# EAGLE board Pedalbox (EAGLE 7.7.0)
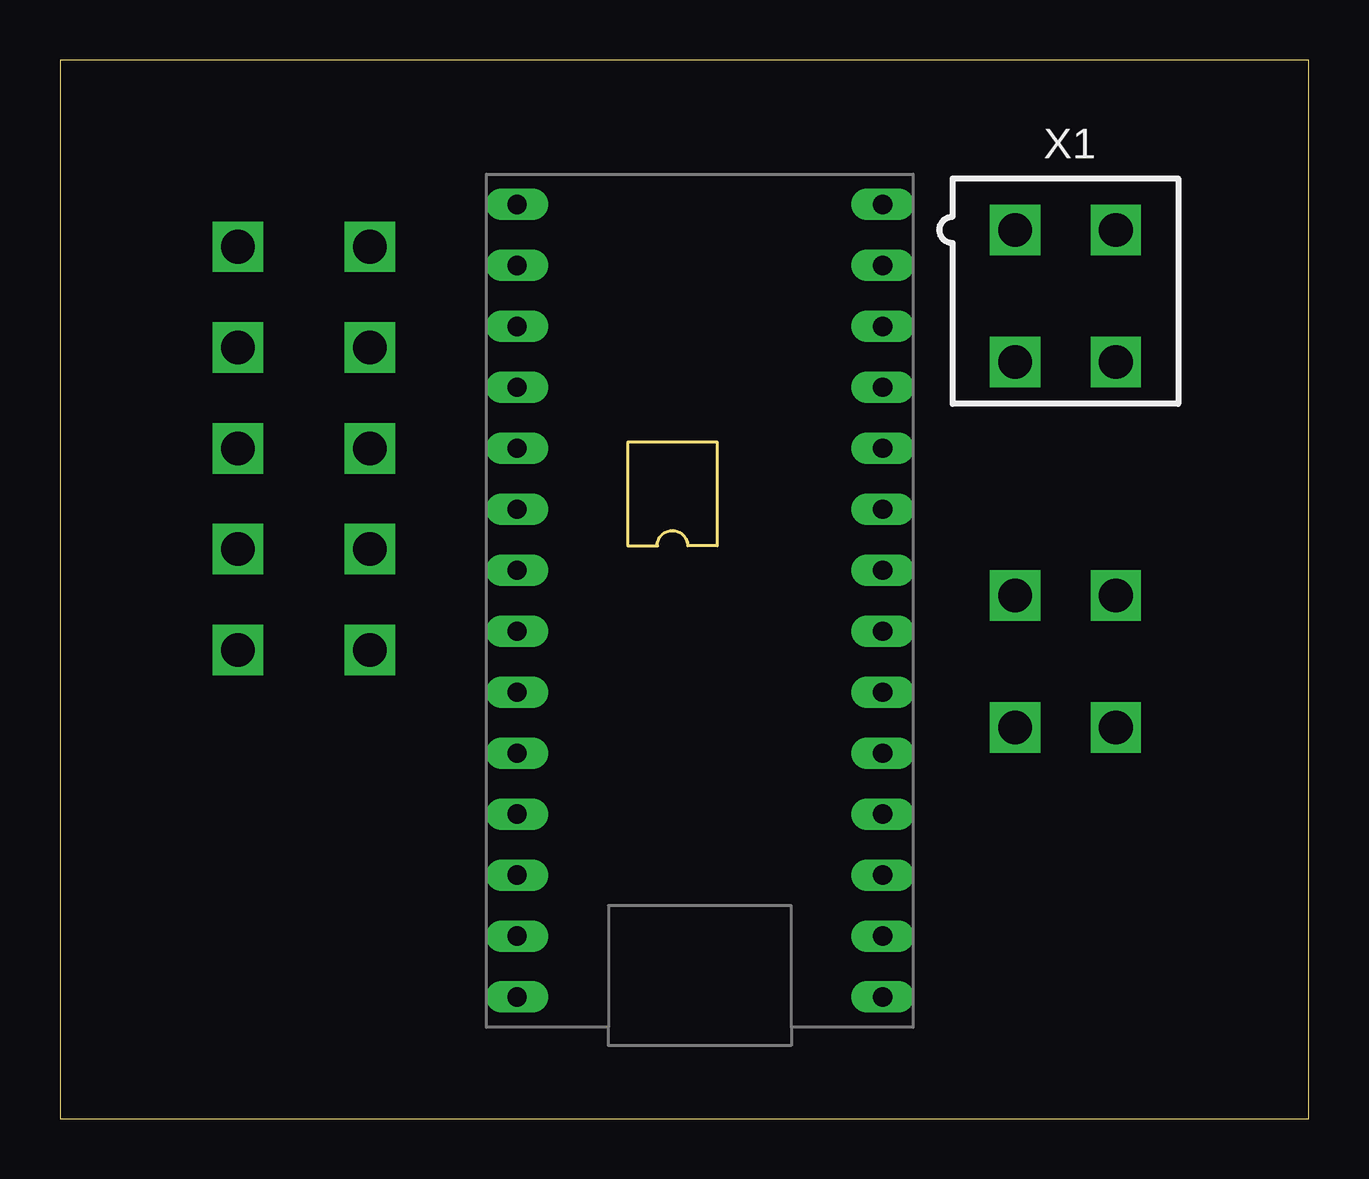
[diagram p0: board, top side]
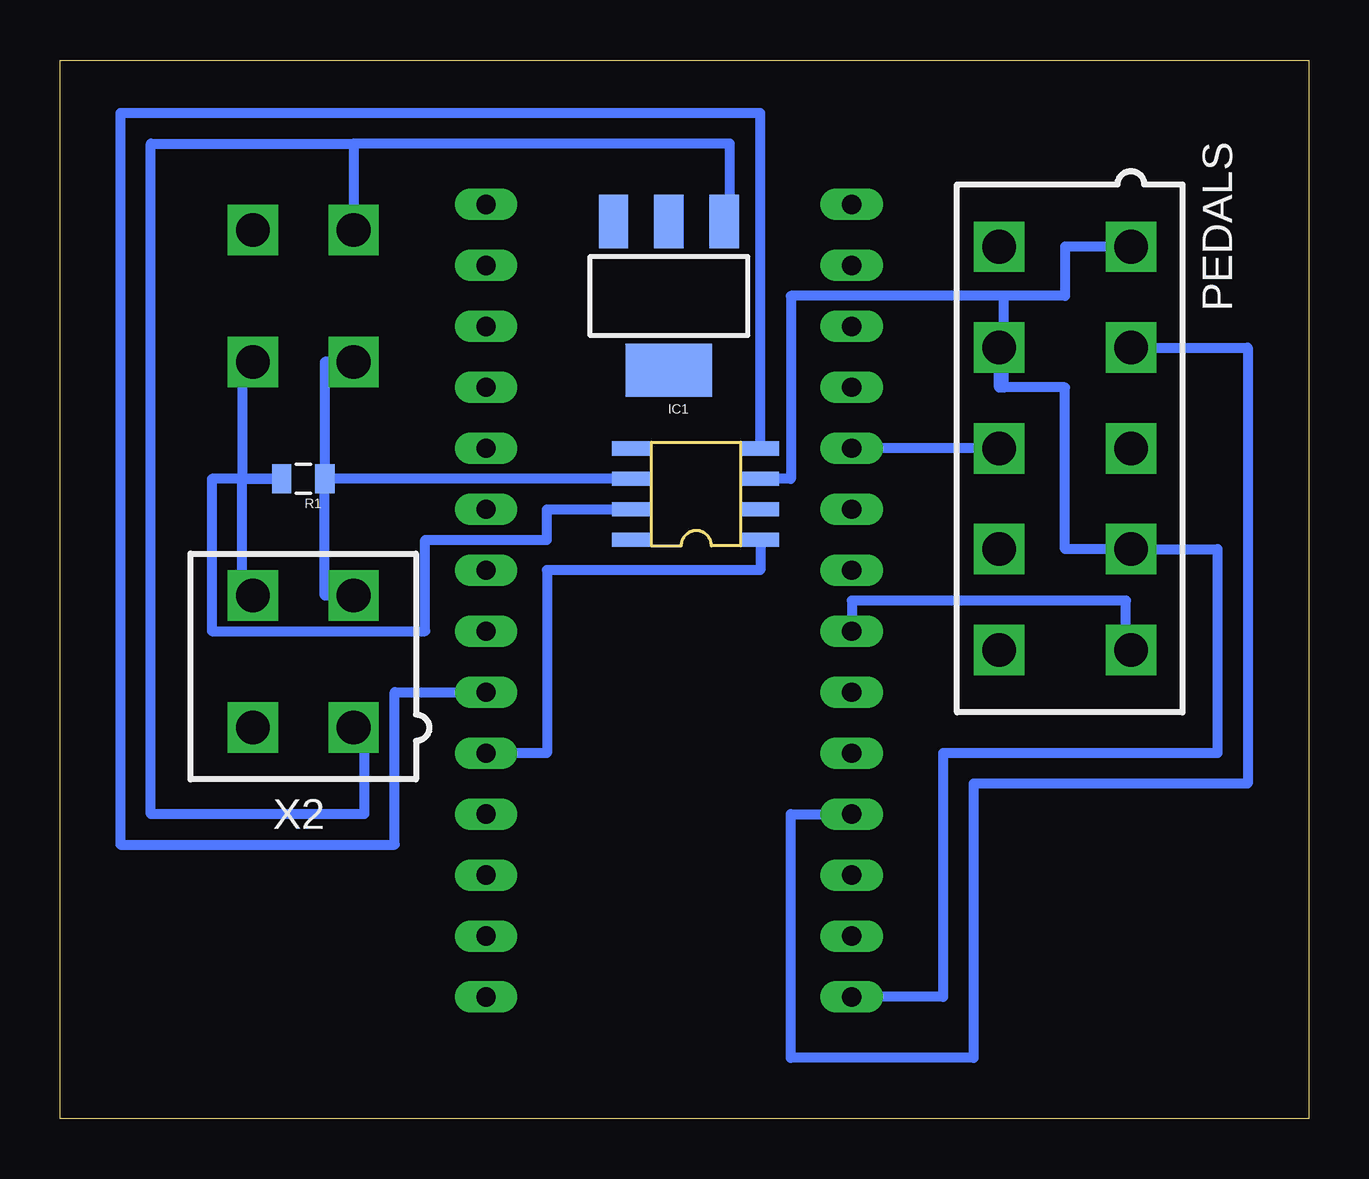
[diagram p1: board, bottom side, seen from below]

Size 52.05 x 44.12 mm. Coordinates in mm from the lower left corner, seen from the top.
Outline: 0,0 52.05,0 52.05,44.12 0,44.12 0,0
Copper layers (1*16): Top 0.035mm / dielectric 1.5mm / Bottom 0.035mm
Design rules "default": minimum track width 10mil, minimum drill 24mil, track to track 8mil, track to pad 8mil, pad to pad 8mil, via to via 8mil, smd to smd 8mil, copper to edge 40mil, drill to drill 8mil, minimum pad ring 10mil, minimum via ring 8mil, stop-mask expansion 4mil, vias tented up to drill 0mil, thermal gap 10mil

## Footprints (pad centres in the part's own frame; a part is rotated, then mirrored left to right if it is on the bottom)
SOT223 = smd 1.219 x 2.235: 1 -2.311,-3.099; 2 0,-3.099; 3 2.311,-3.099 | smd 3.6 x 2.2: 4 0,3.099
MINIFIT_5566-10 = drill 1.4 square: 1 8.4,-2.75; 2 4.2,-2.75; 3 0,-2.75; 4 -4.2,-2.75; 5 -8.4,-2.75; 6 8.4,2.75; 7 4.2,2.75; 8 0,2.75; 9 -4.2,2.75; 10 -8.4,2.75
0805 = smd 0.8 x 1.2: 1 -0.9,0; 2 0.9,0
TEENSY_3.2_SIMPLE = drill 0.8 long: 3.3V 16.51,29.21; A0 16.51,3.81; A1 16.51,6.35; A2 16.51,8.89; A3 16.51,11.43; A4 16.51,13.97; A5 16.51,16.51; A6 16.51,19.05; A7 16.51,21.59; A8 16.51,24.13; A9 16.51,26.67; AGND 16.51,31.75; D0(RX1) 1.27,31.75; D1(TX1) 1.27,29.21; D2 1.27,26.67; D3(CANTX) 1.27,24.13; D4(CANRX) 1.27,21.59; D5 1.27,19.05; D6 1.27,16.51; D7(RX3) 1.27,13.97; D8(TX3) 1.27,11.43; D9(RX2) 1.27,8.89; D10(TX2) 1.27,6.35; D11 1.27,3.81; D12 1.27,1.27; D13 16.51,1.27; GND 1.27,34.29; VIN 16.51,34.29
SOIC08 = smd 0.6 x 1.55: 1 0,0; 2 1.27,0; 3 2.54,0; 4 3.81,0; 5 3.81,5.4; 6 2.54,5.4; 7 1.27,5.4; 8 0,5.4
MINIFIT_5566-4 = drill 1.4 square: 1 2.1,-2.75; 2 -2.1,-2.75; 3 2.1,2.75; 4 -2.1,2.75

## Placement (x,y rotation side)
IC1  [SOT223]  26.67,34.29 180 bottom
PEDALS  MINIFIT_5566-10  [MINIFIT_5566-10]  10.16,27.94 90 bottom
R1  120  [0805]  41.91,26.67 180 bottom
U$1  TEENSY_3.2_SIMPLE  [TEENSY_3.2_SIMPLE]  35.56,39.37 180 top
U$2  MCP2551SOIC  [SOIC08]  22.86,24.13 90 bottom
X1  MINIFIT_5566-4  [MINIFIT_5566-4]  41.91,34.29 180 top
X2  MINIFIT_5566-4  [MINIFIT_5566-4]  41.91,19.05 0 bottom

## Library data of the parts
IC1 R1 U$1 U$2 = HyTechDevices
PEDALS X1 X2 = HyTechDevices; OC_FARNELL: unknown; OC_NEWARK: unknown

## Nets
GND: IC1.2 IC1.4 PEDALS.3 PEDALS.6 PEDALS.9 U$1.GND U$2.2 X2.2
N$1: R1.2 U$2.7 X1.4 X2.4
N$2: R1.1 U$2.6 X1.3 X2.3
N$3: PEDALS.2 U$1.A9
N$4: IC1.1 X1.1 X2.1
N$5: PEDALS.5 U$1.A6
N$6: PEDALS.8 U$1.A3
N$7: PEDALS.1 PEDALS.4 PEDALS.7 U$1.VIN U$2.3
N$8: U$1.D4(CANRX) U$2.4
N$9: U$1.D3(CANTX) U$2.1

## Tracks (layer width: path | path; a pad name or v marks a point on that pad's centre or on a via)
GND
  cutout Bottom: 1.27,43.18 50.8,43.18 50.8,1.27 1.27,1.27
N$1
  Bottom 0.406: X2.4 44.45,21.8 44.45,26.67 | 44.45,26.67 R1.2 45.72,26.67 45.72,20.32 36.83,20.32 36.83,24.13 31.75,24.13 31.75,25.4 U$2.7 | X1.4 44.45,31.54 44.45,26.67
N$2
  Bottom 0.406: X2.3 41.01,21.8 R1.1 | X1.3 41.01,31.54 R1.1 | U$2.6 R1.1
N$3
  Bottom 0.406: PEDALS.2 2.54,32.14 2.54,13.97 13.97,13.97 13.97,2.54 21.59,2.54 21.59,12.7 U$1.A9
N$4
  Bottom 0.406: IC1.1 24.13,37.39 24.13,40.64 39.81,40.64 | 39.81,40.64 X1.1 | X2.1 39.37,16.3 39.37,12.7 48.26,12.7 48.26,40.64 39.81,40.64
N$5
  Bottom 0.406: PEDALS.5 7.62,19.54 7.62,21.59 19.05,21.59 U$1.A6
N$6
  Bottom 0.406: PEDALS.8 U$1.A3
N$7
  Bottom 0.406: U$1.VIN 15.24,5.08 15.24,15.24 3.81,15.24 3.81,23.74 PEDALS.4 10.16,23.74 10.16,30.48 12.7,30.48 | PEDALS.7 12.91,30.48 12.7,30.48 | 12.7,30.48 12.7,34.29 | 12.7,34.29 21.59,34.29 21.59,26.67 U$2.3 | PEDALS.1 10.16,36.34 10.16,34.29 12.7,34.29
N$8
  Bottom 0.406: U$2.4 22.86,41.91 49.53,41.91 49.53,11.43 38.1,11.43 38.1,17.78 U$1.D4(CANRX)
N$9
  Bottom 0.406: U$2.1 22.86,22.86 31.75,22.86 31.75,15.24 U$1.D3(CANTX)